# EAGLE board dust_environment_sensor_v2 (EAGLE 6.4)
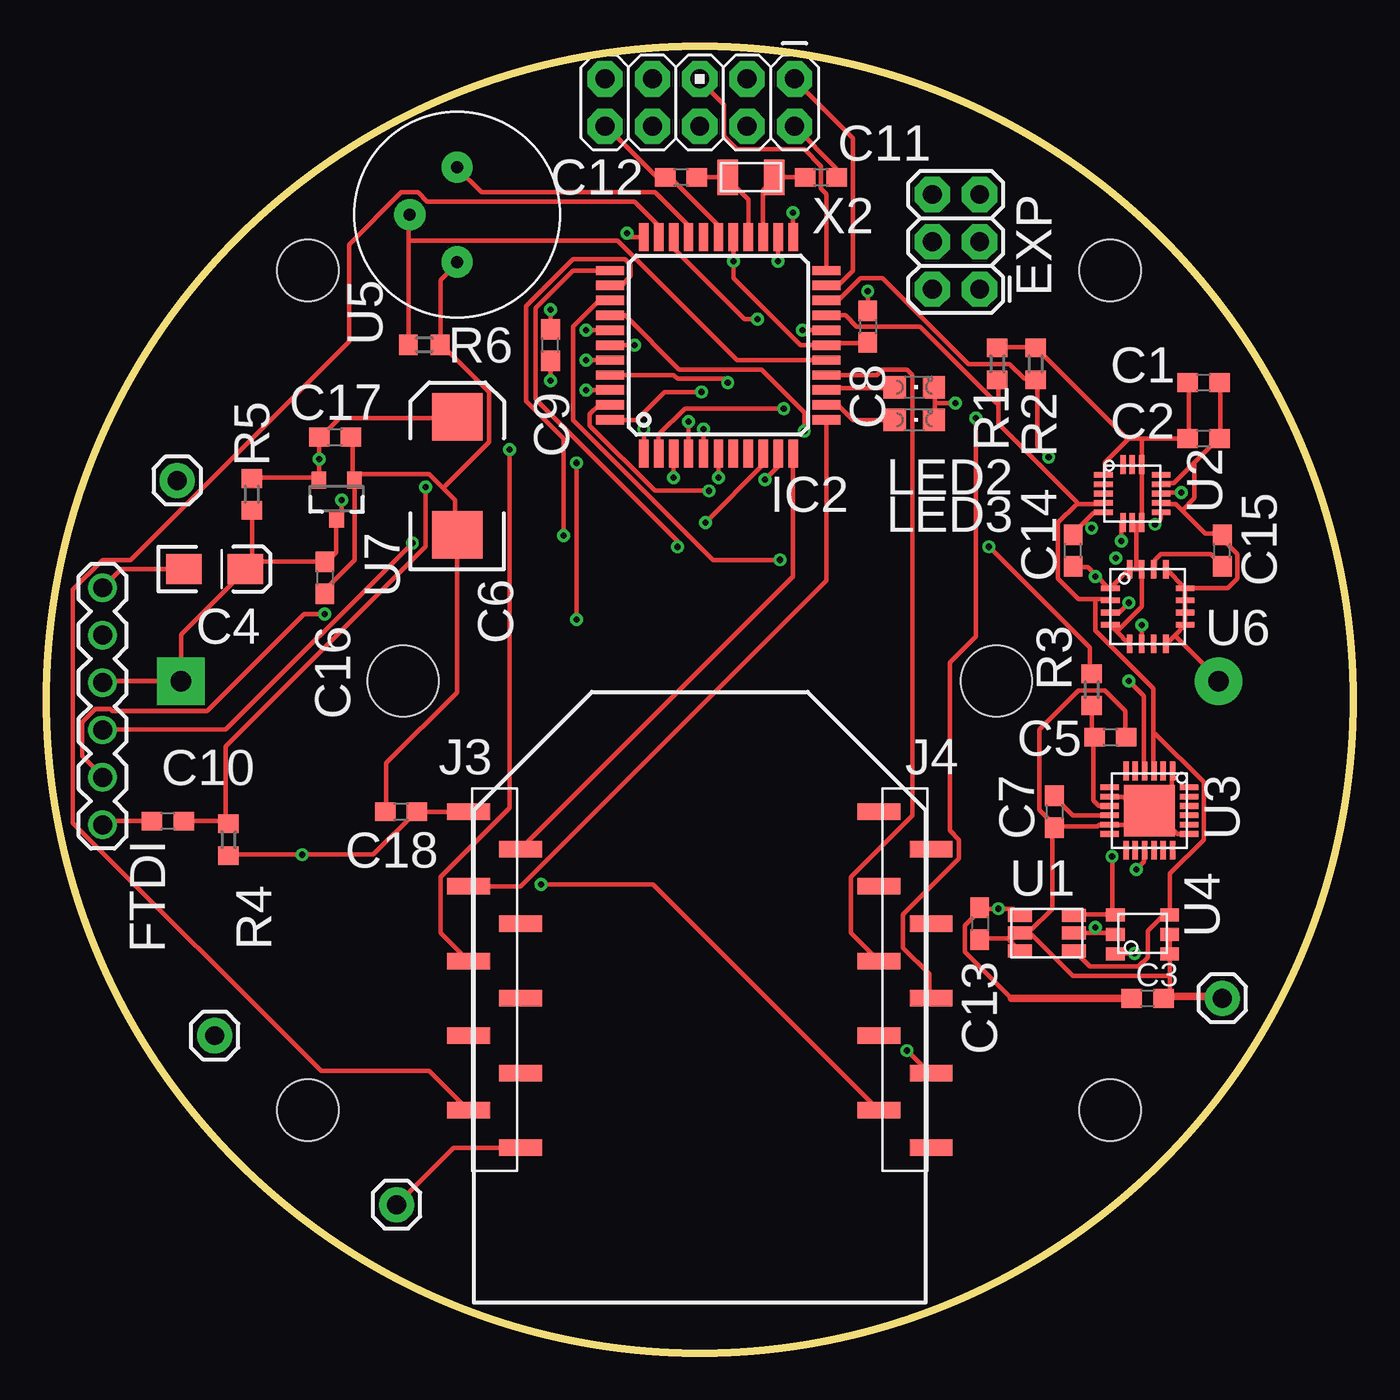
[diagram p0: board, top side]
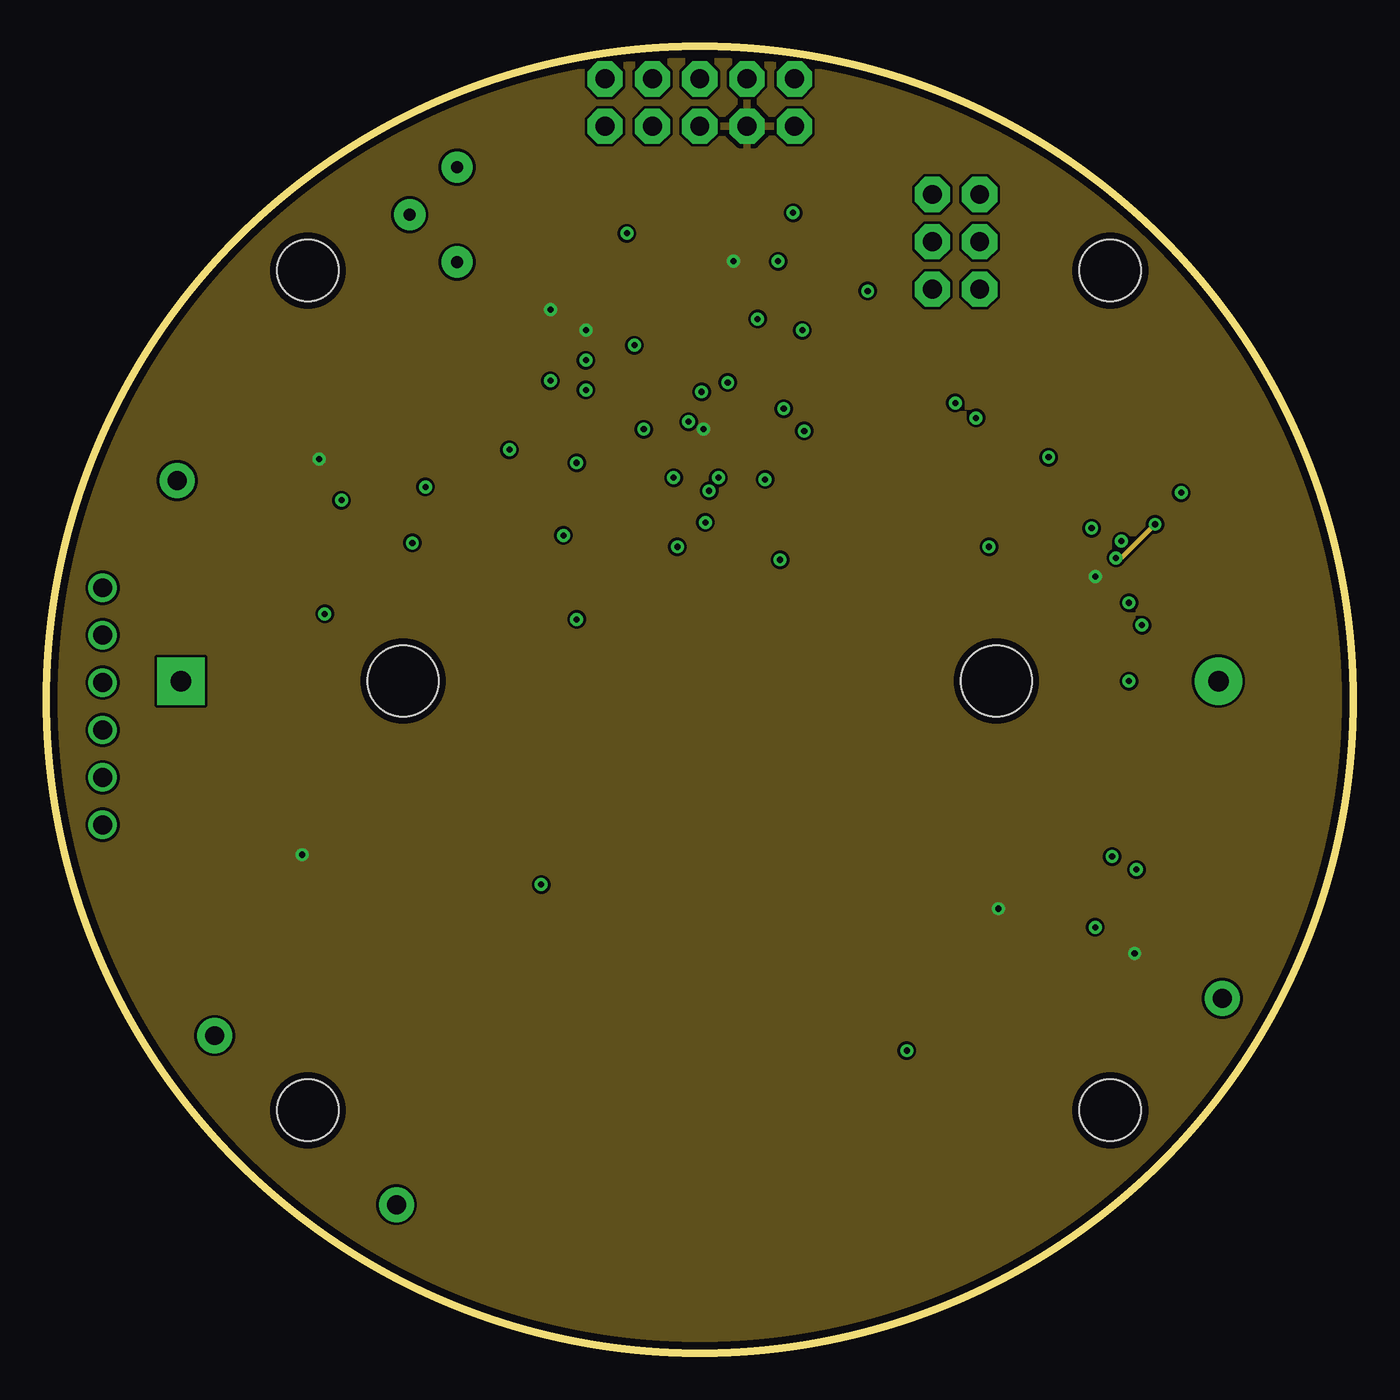
[diagram p1: board, inner layer VCC]
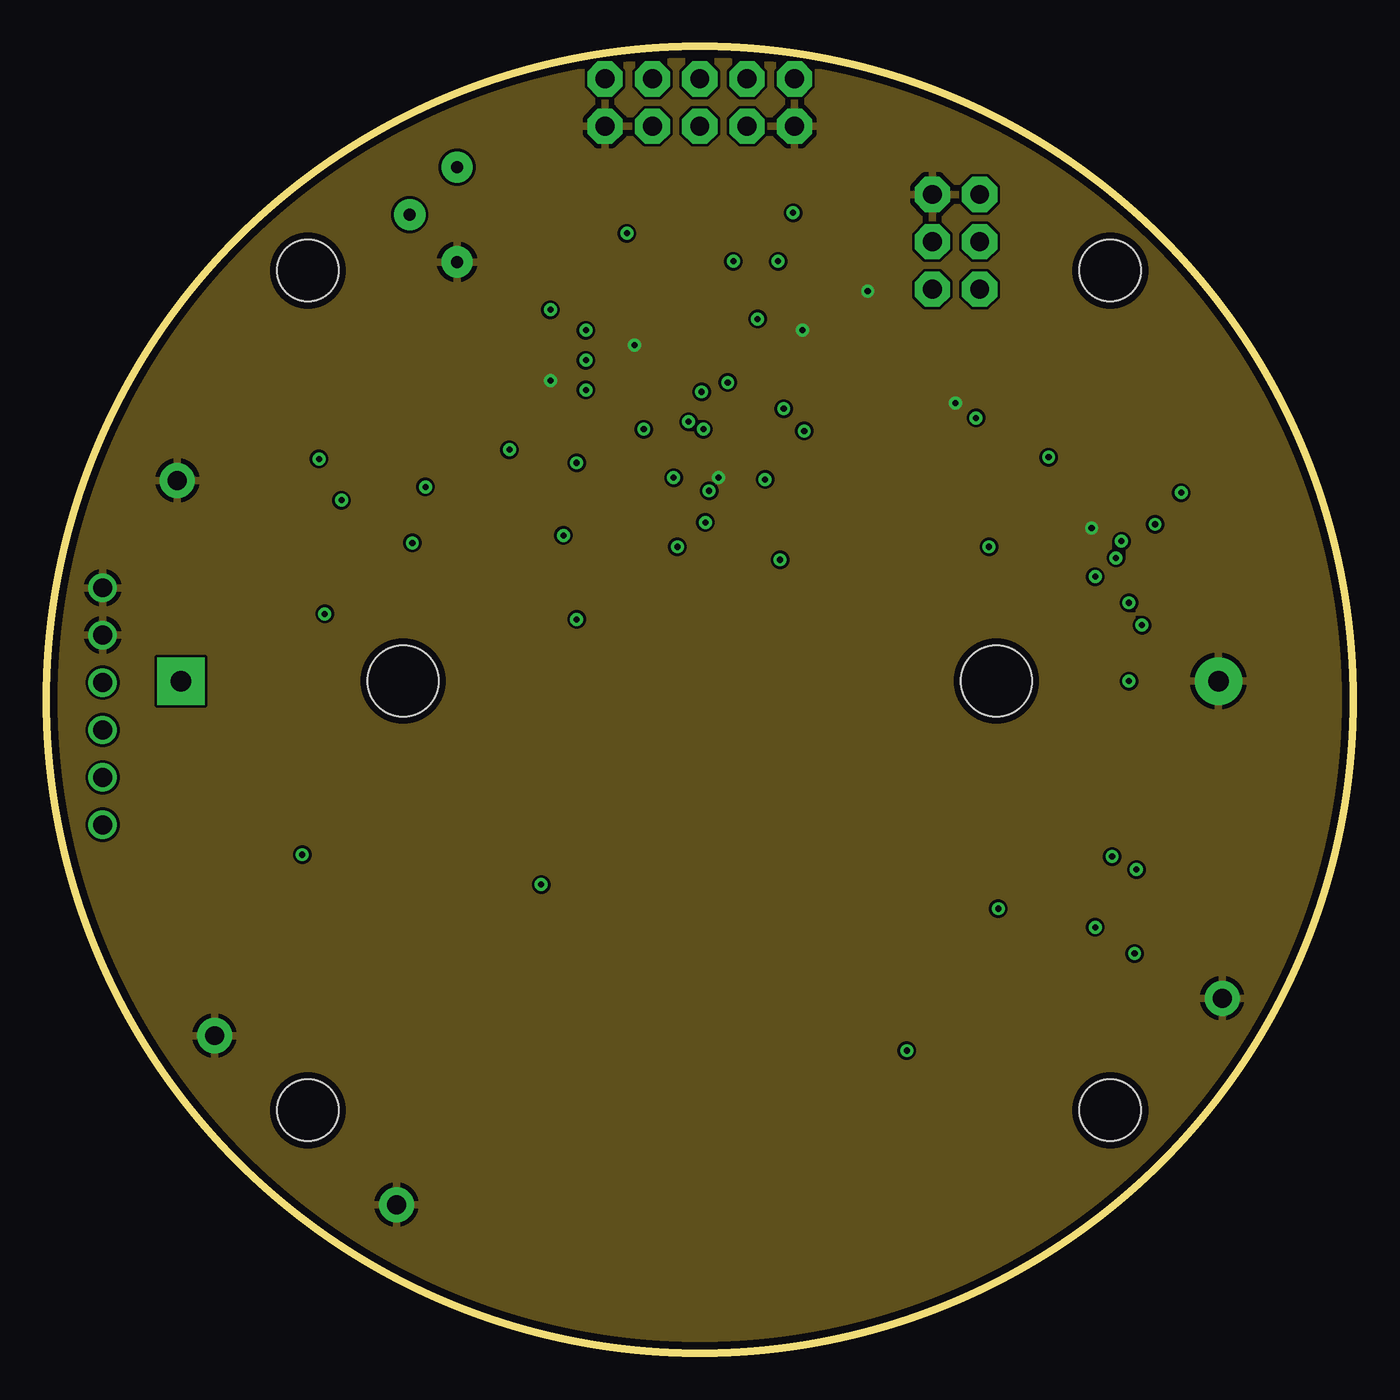
[diagram p2: board, inner layer GND]
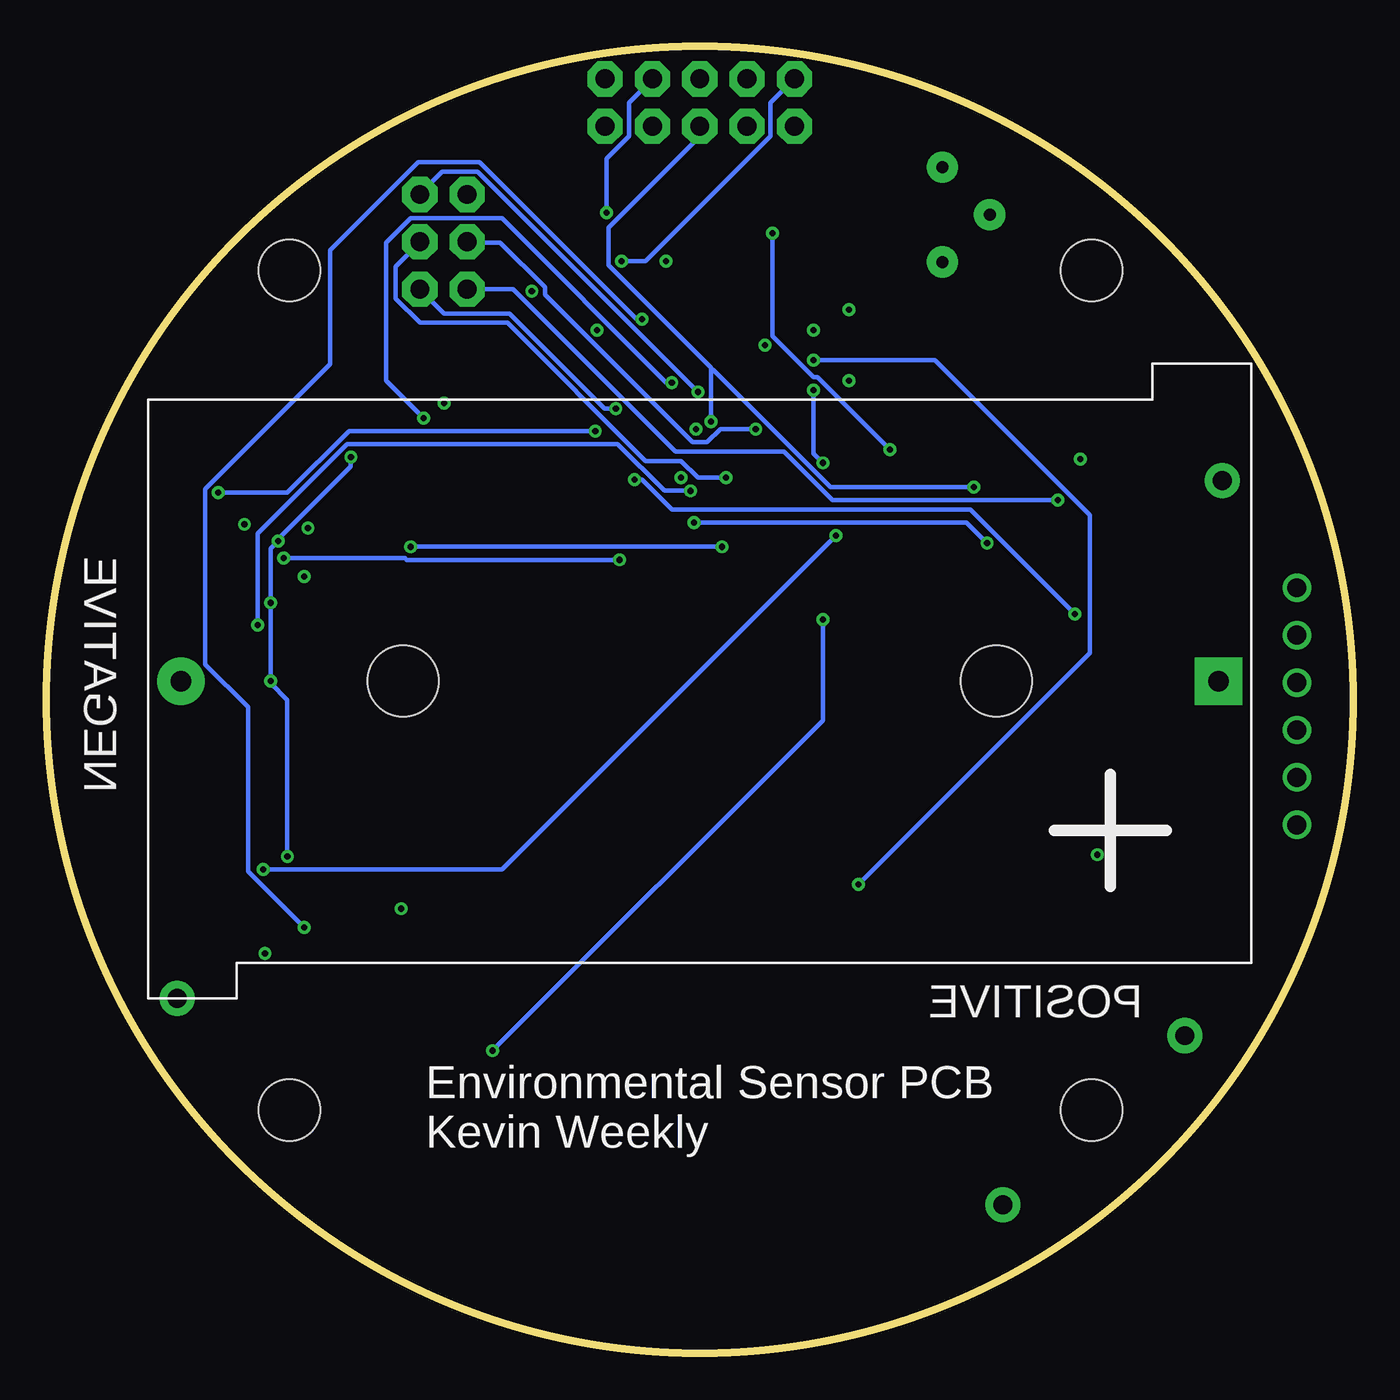
[diagram p3: board, bottom side, seen from below]

Size 70 x 70 mm. Coordinates in mm from the lower left corner, seen from the top.
Outline: circle at 35,35 radius 35
Copper layers (1+2*15+16): Top 0.0356mm / dielectric 0.2007mm / VCC 0.017mm / dielectric 1.5mm / GND 0.017mm / dielectric 0.2007mm / Bottom 0.0356mm
Design rules "LaenPCBOrder_4LAYER": minimum track width 6mil, minimum drill 13mil, track to track 6mil, track to pad 6mil, pad to pad 6mil, via to via 6mil, smd to smd 6mil, copper to edge 15mil, drill to drill 6mil, minimum pad ring 7mil, minimum via ring 7mil, stop-mask expansion 4mil, vias tented up to drill 0mil, thermal gap 10mil
Net classes: 0 default: width 0.254 mm, drill 0.33 mm, clearance 0.152 mm; 1 power: width 0.254 mm, drill 0.33 mm, clearance 0.152 mm

## Footprints (pad centres in the part's own frame; a part is rotated, then mirrored left to right if it is on the bottom)
C0603 = smd 1.1 x 1: 1 -0.85,0; 2 0.85,0
EIA3216-KIT = smd 1.9 x 1.6: A 1.65,0; C -1.65,0
EIA7343 = smd 2.55 x 2.7: A 3.17,0; C -3.17,0
TQFP44 = smd 1.5 x 0.5: 1 -5.8,4; 2 -5.8,3.2; 3 -5.8,2.4; 4 -5.8,1.6; 5 -5.8,0.8; 6 -5.8,0; 7 -5.8,-0.8; 8 -5.8,-1.6; 9 -5.8,-2.4; 10 -5.8,-3.2; 11 -5.8,-4; 23 5.8,-4; 24 5.8,-3.2; 25 5.8,-2.4; 26 5.8,-1.6; 27 5.8,-0.8; 28 5.8,0; 29 5.8,0.8; 30 5.8,1.6; 31 5.8,2.4; 32 5.8,3.2; 33 5.8,4 | smd 0.5 x 1.5: 12 -4,-5.8; 13 -3.2,-5.8; 14 -2.4,-5.8; 15 -1.6,-5.8; 16 -0.8,-5.8; 17 0,-5.8; 18 0.8,-5.8; 19 1.6,-5.8; 20 2.4,-5.8; 21 3.2,-5.8; 22 4,-5.8; 34 4,5.8; 35 3.2,5.8; 36 2.4,5.8; 37 1.6,5.8; 38 0.8,5.8; 39 0,5.8; 40 -0.8,5.8; 41 -1.6,5.8; 42 -2.4,5.8; 43 -3.2,5.8; 44 -4,5.8
BX0036 = drill 1.1 pad 2.54: NEG 27.8,0 | drill 1.1 pad 2.54 square: POS -27.8,0 | hole 3.8: 15.9,0; -15.9,0
2X3 = drill 1.016 pad 1.88 octagon: 1 0,0; 2 0,2.54; 3 2.54,0; 4 2.54,2.54; 5 5.08,0; 6 5.08,2.54
XBEE_1-10_SMT = smd 2.29 x 0.89: 1 -12.395,9; 2 -9.605,7; 3 -12.395,5; 4 -9.605,3; 5 -12.395,1; 6 -9.605,-1; 7 -12.395,-3; 8 -9.605,-5; 9 -12.395,-7; 10 -9.605,-9
XBEE_11-20_SMT = smd 2.29 x 0.89: 11 12.395,-9; 12 9.605,-7; 13 12.395,-5; 14 9.605,-3; 15 12.395,-1; 16 9.605,1; 17 12.395,3; 18 9.605,5; 19 12.395,7; 20 9.605,9
1X01 = drill 1.016 pad 1.88: 1 0,0
1X06 = drill 1.016: 1 0,0; 2 2.54,0; 3 5.08,0; 4 7.62,0; 5 10.16,0; 6 12.7,0
AVR_ICSP = drill 1.016 pad 1.88 octagon: 1 -1.27,5.08; 2 1.27,5.08; 3 -1.27,2.54; 4 1.27,2.54; 5 -1.27,0; 6 1.27,0; 7 -1.27,-2.54; 8 1.27,-2.54; 9 -1.27,-5.08; 10 1.27,-5.08
CHIPLED_0805 = smd 1.2 x 1.2: A 0,-1.05; C 0,1.05
R0603 = smd 1 x 1.1: 1 -0.85,0; 2 0.85,0
STAND-OFF = hole 3.302: 0,0
T_TAOS = smd 1.3 x 0.7: 1 -1.45,0.95; 2 -1.45,0; 3 -1.45,-0.95; 4 1.45,-0.95; 5 1.45,0; 6 1.45,0.95
LGA16_ST = smd 1 x 0.3: 1 -1.55,1; 2 -1.55,0.5; 3 -1.55,0; 4 -1.55,-0.5; 5 -1.55,-1; 9 1.55,-1; 10 1.55,-0.5; 11 1.55,0; 12 1.55,0.5; 13 1.55,1 | smd 0.3 x 1: 6 -0.5,-1.55; 7 0,-1.55; 8 0.5,-1.55; 14 0.5,1.55; 15 0,1.55; 16 -0.5,1.55
QFN24_SILICON_LABS = smd 1 x 0.3: 1 -2.125,1.25; 2 -2.125,0.75; 3 -2.125,0.25; 4 -2.125,-0.25; 5 -2.125,-0.75; 6 -2.125,-1.25; 13 2.125,-1.25; 14 2.125,-0.75; 15 2.125,-0.25; 16 2.125,0.25; 17 2.125,0.75; 18 2.125,1.25 | smd 0.3 x 1: 7 -1.25,-2.125; 8 -0.75,-2.125; 9 -0.25,-2.125; 10 0.25,-2.125; 11 0.75,-2.125; 12 1.25,-2.125; 19 1.25,2.125; 20 0.75,2.125; 21 0.25,2.125; 22 -0.25,2.125; 23 -0.75,2.125; 24 -1.25,2.125 | smd 2.75 x 2.75: PAD 0,0
CL6_TAOS = smd 1 x 0.7: 1 -1.45,-1.05; 2 1.45,-1.05; 3 1.45,0; 4 1.45,1.05; 5 -1.45,1.05; 6 -1.45,0
AMN41121 = drill 0.635 pad 1.676: GND 0,-2.54; OUT -2.54,0; VDD 0,2.54
LGA16_4X4_ST = smd 1 x 0.3: 1 -2,0.975; 2 -2,0.325; 3 -2,-0.325; 4 -2,-0.975; 9 2,-0.975; 10 2,-0.325; 11 2,0.325; 12 2,0.975 | smd 0.3 x 1: 5 -0.975,-2; 6 -0.325,-2; 7 0.325,-2; 8 0.975,-2; 13 0.975,2; 14 0.325,2; 15 -0.325,2; 16 -0.975,2
SOT23-3 = smd 0.8 x 0.9: 1 -0.95,-1; 2 0.95,-1; 3 0,1.1
ABS07 = smd 1.1 x 1.9: 1 -1.25,0; 2 1.25,0

## Placement (x,y rotation side)
C1  100n  [C0603]  62,52 0 top
C2  10u  [C0603]  62,49 0 top
C3  100n  [C0603]  59,19 0 top
C4  100u  [EIA3216-KIT]  9,42 0 top
C5  100n  [C0603]  57,33 0 top
C6  680u  [EIA7343]  22,47 90 top
C7  4.7u  [C0603]  54,29 270 top
C8  100n  [C0603]  44,55 270 top
C9  100n  [C0603]  27,54 90 top
C10  100n  [C0603]  6.5,28.5 180 top
C11  10p  [C0603]  41.5,63 0 top
C12  10p  [C0603]  34,63 180 top
C13  100n  [C0603]  50,23 270 top
C14  10u  [C0603]  55,43 90 top
C15  100n  [C0603]  63,43 90 top
C16  1u  [C0603]  14.9,41.54 270 top
C17  1u  [C0603]  15.46,49.08 0 top
C18  100n  [C0603]  19,29 0 top
IC2  ATMEGA644A  [TQFP44]  36,54 90 top
J1  3.6V Lithium C cell  [BX0036]  35,36 180 bottom
J2  EXP  [2X3]  50,57 90 top
J3  XBEE_1-10SMT  [XBEE_1-10_SMT]  35,20 0 top
J4  XBEE_11-20SMT  [XBEE_11-20_SMT]  35,20 0 top
JP4  M01PTH  [1X01]  63,19 0 top
JP5  M01PTH  [1X01]  18.75,7.94 0 top
JP6  M01PTH  [1X01]  7,46.75 0 top
JP7  M01PTH  [1X01]  9,17 0 top
JP8  [1X06]  3,41 270 top
JP9  JTAG  [AVR_ICSP]  35,67 270 top
LED2  [CHIPLED_0805]  46.5,51.75 270 top
LED3  [CHIPLED_0805]  46.5,50 270 top
R1  2.2k  [R0603]  50.95,53 90 top
R2  2.2k  [R0603]  53,53 90 top
R3  15  [R0603]  56,35.54 270 top
R4  10k  [R0603]  9.75,27.5 270 top
R5  0R DNP  [R0603]  11,46 270 top
R6  10k  [R0603]  20.24,54.02 180 top
STANDOFF1  STAND-OFF  [STAND-OFF]  14,13 0 top
STANDOFF2  STAND-OFF  [STAND-OFF]  14,58 0 top
STANDOFF3  STAND-OFF  [STAND-OFF]  57,13 0 top
STANDOFF4  STAND-OFF  [STAND-OFF]  57,58 0 top
U1  TSL2560T  [T_TAOS]  53.6,22.5 0 top
U2  LIS3DH  [LGA16_ST]  58.18,46.05 0 top
U3  SI7005  [QFN24_SILICON_LABS]  59.09,29.06 270 top
U4  TSL2560CL  [CL6_TAOS]  58.72,22.43 0 top
U5  AMN41121  [AMN41121]  22,61 0 top
U6  L3GD20  [LGA16_4X4_ST]  59,40 0 top
U7  MCP1700-3.3V  [SOT23-3]  15.54,45.78 180 top
X2  32.768KHz  [ABS07]  37.75,63 0 top

## Library data of the parts
C1-C3 C5 C7-C18 = rcl
C4 C6 = SparkFun-Capacitors
IC2 = atmel; MPN: ATMEGA644PV-10AU; OC_FARNELL: 1455123; OC_NEWARK: 58M3748
J1 J3 J4 U1-U7 = Cool_Electricity
J2 JP4-JP7 JP9 = SparkFun-Connectors
JP8 = custom
LED2 LED3 = led
R1-R6 = resistor
STANDOFF1-STANDOFF4 = SparkFun-Electromechanical
X2 = WSNlib

## Nets
ACCEL_INT1: IC2.37 U2.11
ACCEL_INT2: IC2.36 U2.9
ATMEGA_TO_FTDI: IC2.10 JP8.5
EXP_CSN: IC2.44 J2.5
EXP_MISO: IC2.2 J2.1
EXP_MOSI: IC2.1 J2.4
EXP_SCK: IC2.3 J2.3
FTDI_TO_ATMEGA: IC2.9 JP8.4
GND: C1.2 C2.2 C3.2 C4.C C5.2 C6.C C7.2 C8.1 C9.1 C11.2 C12.2 C13.2 C14.2 C15.2 C16.2 C17.2 C18.1 IC2.6 IC2.18 IC2.28 IC2.39 J1.NEG J2.6 J3.10 JP4.1 JP5.1 JP6.1 JP7.1 JP8.1 JP8.2 JP9.2 JP9.10 LED2.C LED3.C R6.1 U1.2 U1.3 U2.5 U2.10 U2.12 U3.1 U3.8 U3.11 U3.19 U3.PAD U4.2 U4.3 U5.GND U6.8 U6.9 U6.10 U6.11 U6.12 U6.13 U7.1
GYRO_INT2: IC2.43 U6.6
HUMID_CS: IC2.35 U3.15
HUMID_VCC: IC2.34 R3.1
I2C_SCL: IC2.19 R1.1 U1.4 U2.4 U3.3 U4.4 U6.2
I2C_SDA: IC2.20 R2.1 U1.6 U2.6 U3.4 U4.5 U6.3
LED1: IC2.14 LED2.A
LED2: IC2.13 LED3.A
LIGHT_INT: IC2.31 U1.5 U4.6
MOTE_API_RX: IC2.12 J3.3
MOTE_API_TX: IC2.11 J3.2
MOTE_ASSOC: IC2.41 J4.15
MOTE_RESETN: IC2.33 J3.5
MOTE_RX_RTSN: IC2.15 J4.16
MOTE_SLEEPN: IC2.32 J3.9
MOTE_STATUS: IC2.42 J4.13
MOTE_TX_CTSN: IC2.40 J4.12
N$1: C7.1 U3.10
N$2: C15.1 U6.14
N$6: C11.1 IC2.25 X2.2
N$7: C12.1 IC2.26 X2.1
N$11: C5.1 R3.2 U3.9
PIR_OUT: IC2.16 R6.2 U5.OUT
PIR_VCC: IC2.30 U5.VDD
RST: C10.1 IC2.4 JP9.6 R4.1
RTS#: C10.2 JP8.6
TCK: IC2.21 JP9.1
TDI: IC2.24 JP9.9
TDO: IC2.23 JP9.3
TMS: IC2.22 JP9.5
VBATT: C4.A C16.1 J1.POS J2.2 JP8.3 R5.2 U7.3
VCC: C1.1 C2.1 C3.1 C6.A C8.2 C9.2 C13.1 C14.1 C17.1 C18.2 IC2.5 IC2.17 IC2.27 IC2.38 J3.1 JP9.4 R1.2 R2.2 R4.2 R5.1 U1.1 U2.1 U2.7 U2.8 U2.14 U4.1 U6.1 U6.4 U6.5 U6.15 U6.16 U7.2

## Tracks (layer width: path | path; a pad name or v marks a point on that pad's centre or on a via)
ACCEL_INT1  (via drill 0.33)
  Top 0.254: v60.8,46.1 59.8,46.1 U2.11 | v40.6,49.4 40.6,50.4 38.3,52.7 33.9,52.7 31,55.6 IC2.37
  Bottom 0.254: v60.8,46.1 57.1,46.1 53.8,49.4 v40.6,49.4
ACCEL_INT2  (via drill 0.33)
  Top 0.254: v59.4,44.4 59.7,44.7 59.7,45 U2.9 | v39.3,42.5 35.7,42.5 28.2,50 28.2,55 29.6,56.4 IC2.36
  VCC 0.254: v59.4,44.4 57.6,42.6 v57.3,42.6
  Bottom 0.254: v57.3,42.6 50.8,42.6 50.7,42.5 v39.3,42.5
ATMEGA_TO_FTDI  (via drill 0.33)
  Top 0.254: IC2.10 39.2,47.5 v38.5,46.8 | v14.9,39.6 13.8,39.6 8.6,34.4 3.5,34.4 3.4,34.5 2.6,34.5 1.9,33.8 1.9,32 3,30.9 JP8.5
  Bottom 0.254: v38.5,46.8 38.1,46.8 36.5,45.2 20.5,45.2 v14.9,39.6
EXP_CSN  (via drill 0.33)
  Top 0.254: IC2.44 31.6,50 33.1,51.5 v35.1,51.5
  Bottom 0.254: v35.1,51.5 46.9,63.3 48.8,63.3 50,62.1 J2.5
EXP_MISO  (via drill 0.33)
  Top 0.254: IC2.2 32.8,49.2 34.2,50.6 v39.5,50.6
  Bottom 0.254: v39.5,50.6 40.1,50.6 45.2,55.7 48.7,55.7 J2.1
EXP_MOSI  (via drill 0.33)
  Top 0.254: v32,49.5 IC2.1
  Bottom 0.254: v32,49.5 33.9,49.5 34.6,48.8 35.4,48.8 43.3,56.7 43.3,57.1 45.7,59.5 47.4,59.5 J2.4
EXP_SCK  (via drill 0.33)
  Top 0.254: v33.6,46.9 IC2.3
  Bottom 0.254: v33.6,46.9 35.1,46.9 36,47.8 37.9,47.8 45.3,55.2 50,55.2 51.3,56.5 51.3,58.2 50,59.5 J2.3
FTDI_TO_ATMEGA  (via drill 0.33)
  Top 0.254: IC2.9 38.4,47.6 v35.3,44.5 | v19.6,43.4 9.6,33.4 3,33.4 JP8.4
  Bottom 0.254: v35.3,44.5 20.7,44.5 v19.6,43.4
GND  (via drill 0.33)
  Top 0.254: U7.1 16.4,46.8 16.4,49 C17.2 | C16.2 15,40.7 15,41 16.5,42.5 16.5,46.7 U7.1 | C18.1 18.2,29 18.2,31.6 22,35.4 C6.C 21.9,43.9 21.9,45.7 21.25,46.35 | 21.25,46.35 20.5,47.1 16.5,47.1 U7.1 | 51.6,22.2 51.8,22.2 52.1,22.5 U1.2 | 51.6,22.2 50,22.2 C13.2 | U1.3 51.6,22.1 51.6,22.2 | U3.PAD 59,29 58.3,28.3 57,28.3 U3.11 56.9,28.3 56.4,28.3 56.3,28.2 54,28.2 C7.2 | U3.8 57,29.8 57.7,29.8 58.7,28.8 U3.PAD | U3.1 60.3,31.1 60.3,30.2 59.2,29.1 U3.PAD | U3.19 61.2,27.8 60.6,27.8 59.3,29.1 U3.PAD | C5.2 57.8,33 57.8,34.4 56.7,35.5 55.3,35.5 53.2,33.4 53.2,29.1 54,28.3 C7.2 | U1.2 52.2,22.6 52.7,22.6 53.9,23.8 53.9,28.1 C7.2 | 60.85,45.15 62.1,43.9 63,43.9 C15.2 63.1,43.8 63.1,43.5 63.8,42.8 63.8,41.5 63.3,41 61.1,41 U6.12 | 60.85,45.15 60.5,45.5 59.8,45.5 U2.10 | 61.45,47.65 62.8,49 C2.2 62.9,49.1 62.9,52 C1.2 | 61.45,47.65 60.4,46.6 59.8,46.6 U2.12 | 60.85,45.15 61.5,45.8 61.5,47.6 61.45,47.65 | 60.45,38.45 61,39 U6.9 U6.10 U6.11 U6.12 | 60.45,38.45 60,38 U6.8 | U6.13 60,42 61,41 U6.12 | J3.10 21.8,11 18.8,8 JP5.1 | 55.65,44.55 55,43.9 C14.2 | 55.65,44.55 56.1,45 56.6,45 U2.5 | 47.6,50.9 47.6,51.7 LED2.C | 47.6,50.9 47.6,50 LED3.C | U4.3 60.2,22.4 60.2,21.4 U4.2 60.2,21.3 60.2,20.2 | v27,52.1 C9.1 | U5.GND 22,58.4 21.1,57.5 21.1,54.1 R6.1 21.2,54 23.7,51.5 23.7,48.8 21.25,46.35 | v44,56.9 C8.1 | JP9.10 30,65.7 32.7,63 C12.2 33.2,62.9 33.5,62.9 36,60.4 IC2.28 | C11.2 42.3,63 42.3,63.5 40.1,65.7 JP9.2 | 60.2,19.1 60.2,20.2 | v31.5,54 IC2.39 | v36,46.9 IC2.6 | v40.5,54.8 IC2.18 | v48.7,50.9 47.6,50.9 | C4.C 4,42 JP8.1 | v56,44.2 55.65,44.55 | 60.45,38.45 62.8,36.1 J1.NEG | 60.2,20.2 55,20.2 52.7,22.5 U1.2
  Top 0.406: JP4.1 63,19.1 60.2,19.1 60.2,19 C3.2
  pour GND: 0,35 arc-90 35,70 arc-90 70,35 arc-90 35,0 arc-90
GYRO_INT2  (via drill 0.33)
  Top 0.254: v58.7,39 58.7,38 U6.6 | v35.5,46.2 32.6,46.2 29.1,49.7 29.1,50.3 29.6,50.8 IC2.43
  Bottom 0.254: v58.7,39 58.7,43.9 53.9,48.7 39.4,48.7 36.9,46.2 v35.5,46.2
HUMID_CS  (via drill 0.33)
  Top 0.254: v58.4,25.9 58.8,26.3 58.8,26.9 U3.15 | v27.7,43.8 27.7,49 25.7,51 25.7,56.1 28.2,58.6 31,58.6 31.3,58.3 31.3,57.7 30.8,57.2 IC2.35
  Bottom 0.254: v58.4,25.9 45.6,25.9 v27.7,43.8
HUMID_VCC  (via drill 0.33)
  Top 0.254: v50.5,43.2 55.9,37.8 55.9,36.4 R3.1 | v33.8,43.2 33.8,43.5 26.2,51.1 26.2,56 28.2,58 IC2.34
  Bottom 0.254: v33.8,43.2 v50.5,43.2
I2C_SCL
  Top 0.254: U1.4 55.9,20.7 58.5,20.7 59,21.2 59,22.6 59.8,23.4 60.1,23.4 U4.4 60.2,23.6 60.2,25.7 62,27.5 62,30.6 59.4,33.2 59.3,33.2 | 56.2,40.4 55.3,40.4 54.2,41.5 54.2,44.5 55.2,45.5 | 56.2,40.4 57,40.4 U6.2 | 55.2,45.5 56.6,45.5 U2.4 | 59.3,33.2 59.3,35.6 56.2,38.7 56.2,40.4 | 59.3,33.2 59.3,31.2 U3.3 | 51,50.9 51,49.8 55.2,45.6 55.2,45.5 | 51,50.9 51,52.1 R1.1 | IC2.19 42.8,55.6 43.4,55 46.8,55 50.9,50.9 51,50.9
I2C_SDA  (via drill 0.33)
  Top 0.254: IC2.20 42.4,56.4 43.6,57.6 44.8,57.6 49.4,53 51.6,53 52.4,52.2 53,52.2 R2.1 53.1,52.1 53.1,48.6 v53.7,48 | U1.6 55.1,23.5 57.2,23.5 U4.5 57.1,23.6 v57.1,26.6 | v58,40.2 57.5,39.7 57,39.7 U6.3 | v57.6,43.5 57.6,44.5 U2.6 | v58,36 58.8,35.2 58.8,31.2 U3.4
  Bottom 0.254: v57.1,26.6 57.1,35 58,35.9 v58,36 v58,40.2 58,43.1 v57.6,43.5 57.6,43.6 53.7,47.5 v53.7,48
LED1
  Top 0.254: IC2.14 41.9,51.7 45.4,51.7 LED2.A
LED2
  Top 0.254: LED3.A 43.2,50 42.4,50.8 IC2.13
LIGHT_INT  (via drill 0.33)
  Top 0.254: U1.5 56.2,22.5 | 56.2,22.5 57.2,22.5 U4.6 | IC2.31 33.6,59.2 37.4,55.4 v38.1,55.4 | 56.2,22.5 v56.2,22.8
  Bottom 0.254: v38.1,55.4 38.4,55.4 46.8,63.8 50.1,63.8 54.8,59.1 54.8,53 61.5,46.3 61.5,36.9 59.2,34.6 59.2,25.8 v56.2,22.8
MOTE_API_RX
  Top 0.254: IC2.12 41.8,41.4 25.4,25 J3.3
MOTE_API_TX
  Top 0.254: IC2.11 40,41.6 J3.2
MOTE_ASSOC  (via drill 0.33)
  Top 0.254: IC2.41 33.6,52.4 33.8,52.2 36.3,52.2 v36.5,52 | v49.8,50.1 49.8,38.4 48.4,37 48.4,28 48.9,27.5 48.9,26.5 45.9,23.5 45.9,21.7 47.3,20.3 47.3,19 J4.15
  Bottom 0.254: v36.5,52 36.8,52 45.6,60.8 50.5,60.8 51.8,59.5 51.8,52.1 v49.8,50.1
MOTE_RESETN  (via drill 0.33)
  Top 0.254: IC2.33 31.3,59.8 v31.1,60 | v24.8,48.4 24.8,29.2 21.1,25.5 21.1,22.5 J3.5
  Bottom 0.254: v31.1,60 31.1,54.5 28.9,52.3 28.7,52.3 v24.8,48.4
MOTE_RX_RTSN
  Top 0.254: IC2.15 44.5,52.4 44.8,52.7 46.1,52.7 46.4,52.4 46.4,28.8 43.1,25.5 43.1,22.5 J4.16
MOTE_SLEEPN
  Top 0.254: IC2.32 32.8,60.4 31.5,61.7 20.4,61.7 19.9,62.2 19,62.2 16.2,59.4 16.2,54.2 4.5,42.5 3,42.5 1.4,40.9 1.4,28.4 14.7,15.1 20.5,15.1 J3.9
MOTE_STATUS  (via drill 0.33)
  Top 0.254: v28.9,51.6 IC2.42 | v28.4,39.3 v28.4,47.7 | v46.1,16.2 47.3,15 J4.13
  Bottom 0.254: v28.9,51.6 28.9,48.2 v28.4,47.7 | v28.4,39.3 28.4,33.9 v46.1,16.2
MOTE_TX_CTSN  (via drill 0.33)
  Top 0.254: v28.9,53.2 IC2.40 | v26.5,25.1 32.5,25.1 J4.12
  Bottom 0.254: v28.9,53.2 22.4,53.2 14.1,44.9 14.1,37.5 v26.5,25.1
N$1
  Top 0.254: U3.10 56.9,28.8 55,28.8 54,29.8 C7.1
N$2
  Top 0.254: U6.14 59.4,42 59.4,42.5 59.7,42.8 62.4,42.8 63,42.2 C15.1
N$6
  Top 0.254: C11.1 X2.2 39,62.9 38.4,62.3 IC2.25
N$7
  Top 0.254: C12.1 X2.1 36.5,62.9 37.6,61.8 IC2.26
N$11
  Top 0.254: U3.9 56.9,29.3 56.4,29.3 56.1,29.6 56.1,33 C5.1 56,33 56,34.6 R3.2
PIR_OUT
  Top 0.254: 19.4,59.6 19.4,61 U5.OUT | 19.4,59.6 19.4,54.1 R6.2 | IC2.16 37,53.2 30.6,59.6 19.4,59.6
PIR_VCC
  Top 0.254: IC2.30 34.4,60.4 32.6,62.2 23.3,62.2 22,63.5 U5.VDD
RST  (via drill 0.33)
  Top 0.254: C10.1 9.6,28.5 R4.1 9.6,28.6 9.6,32.5 20.3,43.2 v20.3,46.4 | v34.4,49.9 IC2.4
  Bottom 0.254: 34.4,52.7 34.4,52.8 39.9,58.3 39.9,60.3 35,65.2 JP9.6 | 34.4,52.7 v34.4,49.9 | v20.3,46.4 28,46.4 34.3,52.7 34.4,52.7
RTS#
  Top 0.254: C10.2 3.2,28.5 JP8.6
TCK
  Top 0.254: IC2.21 42.4,57.2 43.2,58 43.2,65.1 40.1,68.2 JP9.1
TDI  (via drill 0.33)
  Top 0.254: v39.2,58.5 IC2.24
  Bottom 0.254: v39.2,58.5 37.9,58.5 31.2,65.2 31.2,67 30,68.2 JP9.9
TDO  (via drill 0.33)
  Top 0.254: v40,61.1 IC2.23
  Bottom 0.254: v40,61.1 40,64 38.8,65.2 38.8,67 37.6,68.2 JP9.3
TMS
  Top 0.254: IC2.22 41.8,62.1 41.5,62.4 41.5,63.6 40.6,64.5 37,64.5 36.3,65.2 36.3,66.9 35,68.2 JP9.5
VBATT  (via drill 0.33)
  Top 0.254: JP8.3 3,36 J1.POS 7.2,38.5 10.6,41.9 C4.A | R5.2 11,42.3 10.7,42 C4.A | C4.A 11.1,42.4 14.8,42.4 C16.1 15,42.4 15.5,42.9 15.5,44.6 U7.3 15.6,44.7 15.8,44.9 v15.8,45.7
  Bottom 0.254: J2.2 45,57 36.3,48.3 30.5,48.3 27.9,45.7 v15.8,45.7
VCC  (via drill 0.33)
  Top 0.254: 57.35,38.65 58,38 U6.5 | 57.35,38.65 57,39 U6.4 | 58.4,44.5 U2.8 58.7,44.6 58.7,47.5 U2.14 58.7,47.6 58.7,49 | 58.4,44.5 U2.7 | 58.4,42 U6.16 58,42 57,41 U6.1 56.9,41 56.25,41.65 | 58.4,42 U6.15 58.7,41.9 58.7,40 57.35,38.65 | 56.25,41.65 55.8,42.1 55,42.1 C14.1 | 58.4,42 58.4,44.5 | R1.2 51,53.9 53,53.9 R2.2 53.1,53.8 57.95,48.95 | 57.95,48.95 58,49 58.7,49 | 57.95,48.95 56.7,47.7 56.7,47.1 U2.1 | 58.7,49 C2.1 61.2,49.1 61.2,52 C1.1 | J3.1 C18.2 19.8,29 17.5,26.7 v13.7,26.7 9.8,26.7 R4.2 | R5.1 11,46.9 14.5,46.9 U7.2 14.6,46.8 v14.6,47.9 14.6,49 C17.1 14.7,49.1 15.7,50.1 22,50.1 C6.A | C8.2 44,54.1 41.9,54.1 IC2.17 40.4,54 36.8,57.6 v36.8,58.5 IC2.27 | U1.1 51.8,23.8 v51,23.8 50,23.8 C13.1 50,23.7 49.2,22.9 49.2,21.5 51.7,19 | v58.3,21.4 57.3,21.4 U4.1 | v27,55.9 C9.2 | v35.2,49.5 IC2.5 | v28.9,54.8 IC2.38 | v56.2,41.6 56.25,41.65
  Top 0.406: C3.1 51.7,19
  pour VCC: 0,35 arc90 35,0 arc90 70,35 arc90 35,70 arc90

## Text on the board
tNames: EXP | U4 | FTDI
bNames: NEGATIVE | POSITIVE | Environmental Sensor PCB / Kevin Weekly